# Altium PCB PCB_Rev1.1.PcbDoc (part 4 of 4)
Units mm, origin at the board's own origin, x right, y up, seen from the top; angles counter-clockwise.
Board outline 81.62 x 96.13 mm, 4 copper layers (Top Layer, GND, PWR, Bottom Layer), stack 1.49 mm thick; 185 components, 276 nets, 1052 pads, 353 vias.
Unrouted connection lines stored in the file: 133.
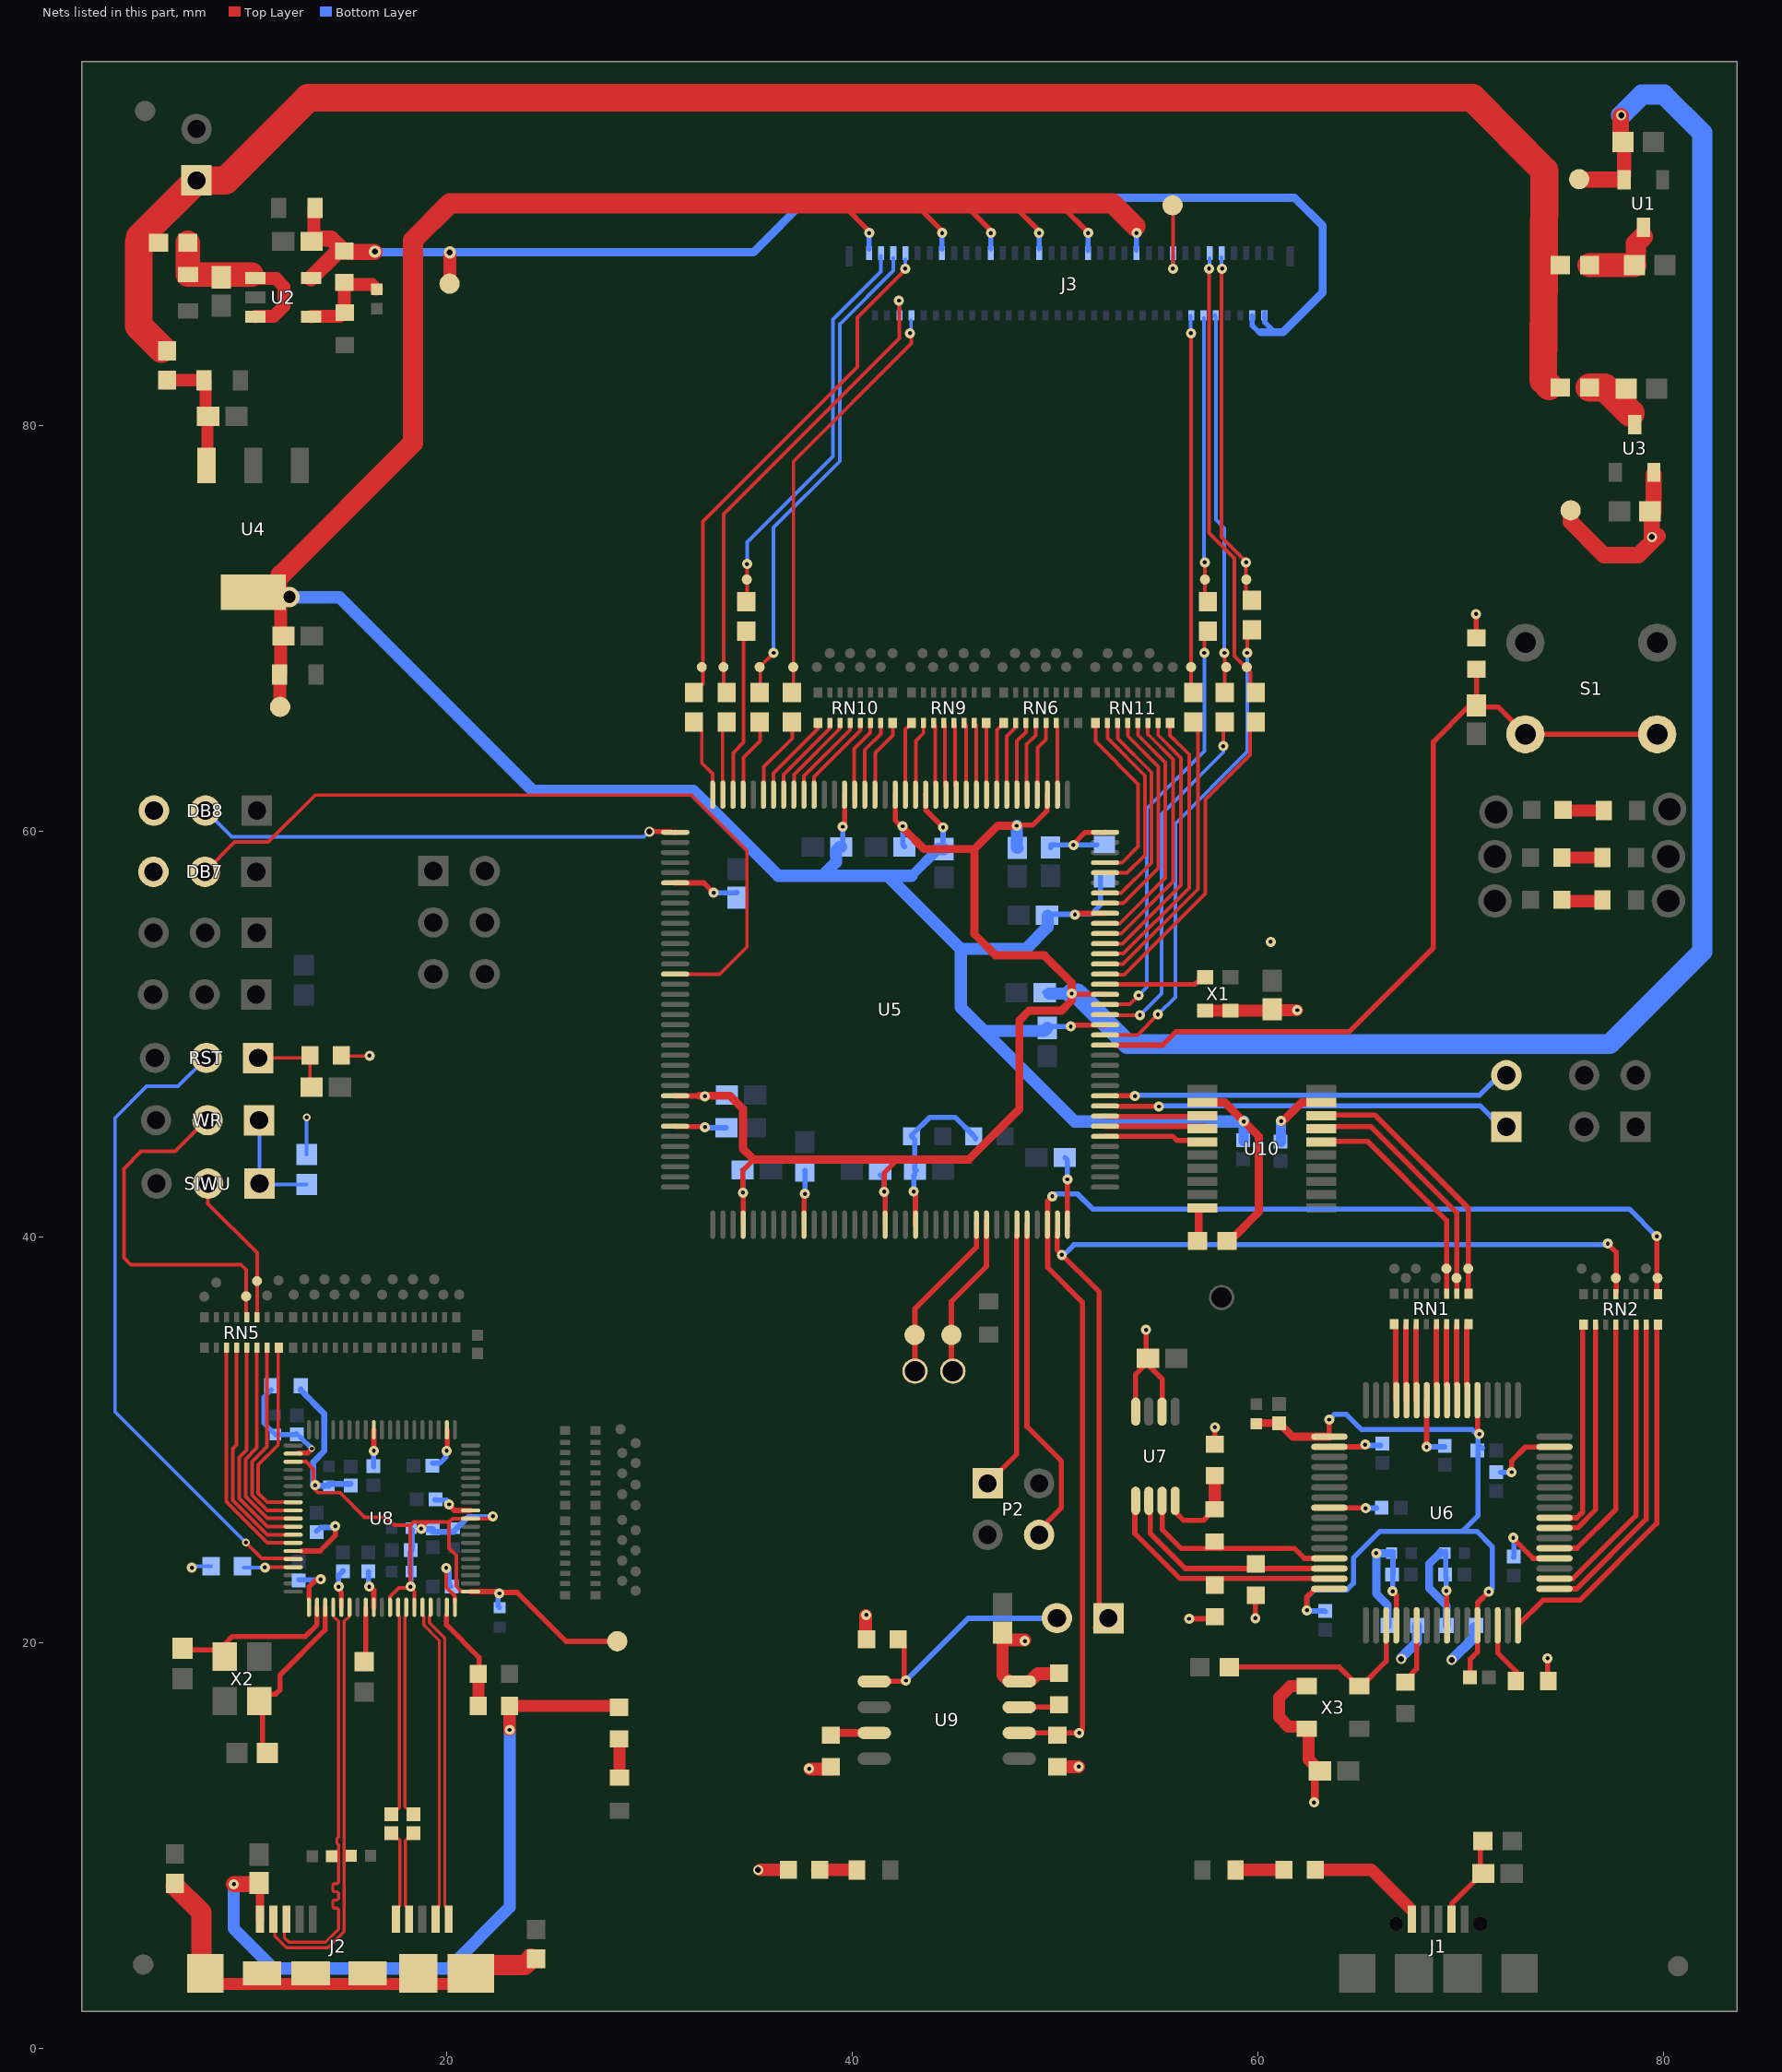
[diagram p5: the nets of this part, all layers, seen from the top]

## Via types
v1: diameter 0.5, hole 0.2, Top Layer to Bottom Layer, tented both sides, 238 vias
v2: diameter 0.5, hole 0.3, Top Layer to Bottom Layer, tented both sides, 106 vias
v3: diameter 0.4, hole 0.2, Top Layer to Bottom Layer, tented both sides, 5 vias
v4: diameter 0.6, hole 0.3, Top Layer to Bottom Layer, tented both sides, 2 vias
v5: diameter 1, hole 0.6, Top Layer to Bottom Layer, tented both sides, 1 vias
v6: diameter 0.3, hole 0.2, Top Layer to Bottom Layer, tented both sides, 1 vias

## Nets (pads, with @x,y where several pads share a name; then routed paths per layer and width w, separated by ;. In a path a pad name is that pad's centre, name@x,y a point inside that pad or via, vN(x,y) a via of type N, cw(c..) or ccw(c..) an arc to the next point about the centre after c; other vN are vias at no path point) (continued)
ICE_Debug3: C74.2 R25.1 S1.3 S1.4 U5.87 | length 42.8
  Top Layer w0.254: U5.87@52.915,49.449 55.287,49.449 55.949,50.111 64.5,50.111 68.645,54.256 68.645,64.409 70.364,66.128 C74.2@70.756,66.128 ; C74.2@70.661,66.033 C74.2@70.756,66.128 ; C74.2@70.77,66.206 R25.1@70.77,68.143 ; 71.337,66.128 C74.2@70.756,66.128 ; S1.4@79.682,64.781 S1.3@73.185,64.781 73.18,64.781 71.83,66.131 70.759,66.131 C74.2@70.756,66.128
ICE_Debug5: P5.1 U5.81 | length 19.5
  Top Layer w0.254: U5.81@53.026,46.444 v1@55.11,46.444
  Bottom Layer w0.254: v1@55.23,46.466 70.941,46.466 71.982,45.425 P5.1@72.245,45.425
  other v1: 55.11,46.424
ICE_Debug6: P5.2 U5.82 | length 19.8
  Top Layer w0.254: U5.82@52.932,46.955 v1@53.95,46.955
  Bottom Layer w0.254: v1@53.898,46.984 53.929,46.984 70.923,46.984 72.008,48.069 P5.2@72.245,48.069
  other v1: 53.929,46.937
ICE_Debug7: DB7.2 U5.15 | length 38.3
  Top Layer w0.18: DB7.2@8.059,57.998 9.529,59.468 11.182,59.468 13.495,61.781 32.062,61.781 34.792,59.051 34.792,54.292 33.451,52.951 U5.15@31.253,52.951
ICE_Debug8: DB8.2 U5.1 | length 23.6
  Top Layer w0.254: v2(29.973,59.979) 31.01,59.979 U5.1@31.03,59.959 ; U5.1@31.251,59.949 U5.1@31.253,59.951 U5.1@31.251,59.953
  Bottom Layer w0.18: DB8.2@8.085,61.019 9.389,59.715 29.709,59.715 v2(29.973,59.979)
ICE_MISO: P2.1 U5.67 | length 12.7
  Top Layer w0.254: P2.1@46.809,27.991 48.097,29.279 U5.67@48.097,40.116
ICE_MOSI: P2.4 U5.68 | length 16.6
  Top Layer w0.254: U5.68@48.603,40.601 48.603,30.64 50.304,28.939 50.304,26.648 P2.4@48.962,25.306 ; P2.4@49.193,25.302 P2.4@49.201,25.302
ICE_SCK: pad.2@79.697,37.97 R18.1 RN2.9 U5.70 U9.6 | length 63.7
  Top Layer w0.254: U9.6@48.222,15.539 v1(51.175,15.539) 51.344,15.708 51.344,36.772 49.627,38.489 49.627,41.772 v1(49.851,41.997) ; RN2.9@79.665,37.297 v1(79.665,40.026)
  Bottom Layer w0.254: v1(49.851,41.997) 49.973,42.119 51.094,42.119 51.843,41.371 78.309,41.371 v1@79.659,40.021
ICE_SS_B: P3.1 pad.2@77.644,37.97 RN2.13 U5.71 | length 50.1
  Top Layer w0.254: U5.71@50.101,40.209 50.101,39.341 52.163,37.279 52.163,20.937 P3.1@51.958,20.732 ; v1@77.277,39.635 77.664,39.248 RN2.13@77.664,37.302
  Bottom Layer w0.254: v1@50.353,39.044 50.919,39.61 v1@77.277,39.61
  other v1: 50.319,39.115 77.245,39.663
ICE_SYSCLK: U5.93 X1.3 | length 4.2
  Top Layer w0.22: U5.93@52.993,52.45 56.879,52.45 X1.3@57.113,52.684
INVERT: J3.12 pad.2@57.383,72.411 R40.2 | length 13.7
  Top Layer w0.18: R40.2@57.371,71.575 v1(57.371,73.256)
  Bottom Layer w0.18: J3.12@57.329,85.303 57.329,73.298 v1(57.371,73.256)
LCD_AVCC_5V25: C2.2 C3.2 J3.2 J3.4 R1.2 TP2.1 U2.5 | length 65.8
  Top Layer w0.635: C3.2@13.323,89.085 C3.2@13.429,89.19 ; C3.2@13.465,89.227 C3.2@13.429,89.19 ; C2.2@13.486,90.736 13.429,90.679 C3.2@13.429,89.19 ; R1.2@14.524,88.501 14.829,88.501 R1.2@14.936,88.608 R1.2@14.911,88.608 ; TP2.1@20.125,86.998 20.138,87.011 v4@20.138,88.477
  Top Layer w0.8: U2.5@13.293,87.27 R1.2@14.524,88.501 ; C3.2@13.465,89.227 14.292,89.227 R1.2@14.911,88.608 ; R1.2@15.163,88.562 v4@16.428,88.562
  Bottom Layer w0.254: J3.4@59.717,85.414 59.717,84.926 60.01,84.633 60.088,84.633 ; J3.2@60.33,85.541 60.33,85.094 60.68,84.744
  Bottom Layer w0.4: v4@16.604,88.545 35.108,88.545 37.796,91.233 61.8,91.233 63.183,89.85 63.183,86.559 61.231,84.607 60.114,84.607
  other v4: 20.138,88.542 16.443,88.575
LCD_VDD_2V5: C12.2 C13.2 C27.1 C29.1 C33.1 C35.1 C76.2 D3.1 J3.23 J3.31 J3.39 J3.47 J3.55 J3.67 R24.2 TP4.1 U4.4 U5.89 U5.100 U5.123 U5.131 U10.2 | length 175.9
  Top Layer w0.254: 39.498,90.907 v1@40.825,89.58 ; v1@39.519,60.273 39.519,60.289 39.603,60.373 U5.131@39.603,61.801 ; 43.093,90.915 v1@44.42,89.588 ; U5.123@43.603,61.801 43.612,61.792 43.612,61.045 v1(44.467,60.19) ; 45.499,90.936 v1@46.826,89.609 ; 47.876,90.922 v1@49.203,89.595 ; 50.289,90.85 v1@51.616,89.523 ; v1@50.775,50.413 50.804,50.442 52.444,50.442 U5.89@52.453,50.451 ; v1@50.94,55.777 51.114,55.951 U5.100@52.453,55.951
  Top Layer w0.4: U10.2@57.77,46.634 58.344,46.634 v1(59.29,45.688) ; R24.2@58.859,40.057 60.039,41.237 60.039,44.959 v1@59.393,45.605
  Top Layer w0.635: U4.4@10.441,71.783 U4.4@11.803,71.783 ; TP4.1@11.768,66.131 11.757,66.142 11.757,67.709 C13.2@11.746,67.72 11.803,67.778 U4.4@11.803,71.783 ; U4.4@11.803,72.63 U4.4@11.803,71.783
  Top Layer w1: U4.4@11.803,72.63 18.311,79.138 18.311,89.133 20.14,90.962 52.813,90.962 53.953,89.822
  Bottom Layer w0.254: C29.1@39.441,59.222 39.546,59.327 39.497,59.376 39.518,59.397 v1(39.518,60.222) ; J3.67@40.822,88.697 v1@40.822,89.502 ; J3.55@44.417,88.705 v1@44.417,89.502 ; v1(44.467,60.19) 44.467,59.165 C27.1@44.506,59.126 ; J3.47@46.823,88.727 v1@46.823,89.502 ; J3.39@49.2,88.712 v1@49.2,89.502 ; C33.1@49.591,55.863 49.622,55.832 49.683,55.893 v1(50.967,55.893) ; C35.1@49.606,50.303 49.724,50.421 49.766,50.378 v1(50.762,50.378) ; C33.1@49.692,55.91 51.768,55.91 52.226,56.368 D3.1@52.226,57.872 ; J3.31@51.613,88.64 v1@51.613,89.502 ; J3.23@54.005,88.647 v1@54.005,89.502
  Bottom Layer w0.5: 42.907,57.802 C27.1@44.231,59.126 ; C76.2@59.297,44.711 v1@59.297,45.688
  Bottom Layer w0.6: v5@12.598,71.535 14.692,71.535 24.225,62.002 32.132,62.002 36.332,57.802 38.514,57.802 ; C29.1@39.441,59.222 39.366,59.222 39.191,59.047 39.191,58.479 38.514,57.802 ; 42.907,57.802 41.733,57.802 ; C27.1@44.231,59.126 C27.1@44.506,59.126 ; 46.556,50.159 49.462,50.159 C35.1@49.606,50.303 ; C33.1@49.622,55.832 49.622,55.271 48.55,54.199 45.336,54.199 ; v1(59.29,45.688) 50.955,45.688 45.336,51.307 45.336,54.199 ; 38.514,57.802 41.733,57.802 ; 41.733,57.802 45.336,54.199
  other v1: 40.825,89.502 44.42,89.502 46.826,89.502 49.203,89.502 51.616,89.502 54.008,89.502
  other v5: 12.229,71.555
NetC4_1: C4.1 R32.2 U1.3 | length 4.4
  Top Layer w0.2: U1.3@78.971,89.316 U1.3@78.971,89.936
  Top Layer w1: C4.1@78.626,87.92 78.626,88.971 U1.3@78.971,89.316
  Top Layer w1.2: R32.2@76.347,87.912 C4.1@78.563,87.912
NetC5_2: C5.2 C6.2 R35.1 U2.1 U2.3 | length 9.2
  Top Layer w0.635: U2.1@10.363,87.449 U2.1@10.543,87.27 10.561,87.253 11.562,87.253 11.96,86.855 11.96,85.893 11.454,85.387 10.561,85.387 U2.3@10.543,85.37
  Top Layer w1.2: C6.2@7.216,87.451 R35.1@7.216,89.02 ; C6.2@7.218,87.449 U2.1@10.363,87.449
NetC7_2: C7.2 R1.1 R2.2 U2.4 | length 5
  Top Layer w0.635: U2.4@13.293,85.37 13.311,85.387 14.717,85.387 14.902,85.573 R2.2@14.952,85.573 14.944,85.581 R1.1@14.944,87.05 ; R1.1@14.936,87.058 R1.1@14.944,87.05 ; C7.2@16.536,86.722 16.308,86.951 15.044,86.951 R1.1@14.944,87.05
NetC8_2: C8.2 C10.2 R34.2 U4.3 | length 6.1
  Top Layer w0.6: R34.2@6.193,82.24 6.195,82.238 8.015,82.238 C8.2@8.017,82.236 8.092,82.161 8.092,80.583 C10.2@8.217,80.458 8.179,80.42 8.179,78.071 U4.3@8.141,78.033
NetC9_1: C9.1 R33.2 U3.3 | length 2.5
  Top Layer w1.37: R33.2@76.348,81.88 77.099,81.88 78.37,80.609
NetC18_2: C18.2 U8.21 X2.3 | length 8.8
  Top Layer w0.254: C18.2@6.962,19.694 7.028,19.63 8.647,19.63 9.045,19.232 9.063,19.249 9.063,19.948 9.413,20.299 13.012,20.299 13.588,20.877 U8.21@13.588,21.736
NetC20_2: C20.2 U8.22 X2.1 | length 8.7
  Top Layer w0.254: C20.2@11.126,14.614 10.895,14.845 10.895,16.931 10.895,17.057 11.294,17.455 11.555,17.455 11.762,17.662 11.762,18.389 13.988,20.616 U8.22@13.988,21.736
NetC25_1: C25.1 J1.4 R16.1 | length 4.7
  Top Layer w0.254: J1.4@69.485,6.369 J1.4@69.501,6.385 ; J1.4@69.495,6.312 69.552,6.369 69.552,7.123 C25.1@70.92,8.491 ; J1.4@69.504,6.216 J1.4@69.504,6.385 ; C25.1@70.969,8.606 70.969,8.982 R16.1@70.969,9.775 ; C25.1@70.977,8.434 70.977,8.606 C25.1@70.977,8.982
NetC30_1: C30.1 D3.2 U5.108 | length 4.3
  Top Layer w0.254: v1@50.872,59.34 51.474,59.942 52.444,59.942 U5.108@52.453,59.951
  Bottom Layer w0.254: C30.1@49.765,59.199 C30.1@49.884,59.318 ; C30.1@49.765,59.318 C30.1@49.884,59.318 ; C30.1@49.908,59.342 C30.1@49.884,59.318 ; D3.2@52.042,59.318 C30.1@49.884,59.318
  other v1: 50.891,59.326
NetC43_1: C43.1 C44.1 L3.2 U8.2 | length 5.3
  Top Layer w0.245: U8.2@12.689,29.333 13.107,29.333 v6(13.333,29.559)
  Bottom Layer w0.245: L3.2@11.339,32.467 10.964,32.092 10.964,30.818 11.529,30.253 C43.1@11.539,30.253 12.54,30.253 12.588,30.301 C44.1@12.588,30.271 ; C44.1@12.76,30.132 v6(13.333,29.559)
NetC59_2: C59.2 R20.2 RST.1 | length 4.4
  Top Layer w0.18: RST.1@10.677,48.823 R20.2@13.117,48.823 ; R20.2@13.24,48.946 13.24,47.46 C59.2@13.321,47.379
  Top Layer w0.5: RST.1@10.677,48.823 RST.1@10.8,48.946 ; R20.2@13.117,48.823 R20.2@13.24,48.946
NetC60_2: C60.2 C68.2 L2.2 U6.4 | length 8.3
  Top Layer w0.254: v1(66.634,22.525) 66.816,22.343 U6.4@66.816,20.846
  Bottom Layer w0.254: C60.2@66.577,24.402 C60.2@66.588,24.413 ; v1(66.634,22.525) 66.637,22.528 66.637,23.347 C68.2@66.64,23.35 ; C68.2@66.652,23.341 C60.2@66.652,24.48
  Bottom Layer w0.4: L2.2@66.395,20.832 66.395,21.84 65.828,22.407 v1(65.828,24.402) C60.2@66.577,24.402
NetC61_2: C61.2 C67.2 L1.2 U6.9 | length 7.8
  Top Layer w0.254: v1(69.283,22.545) 69.307,22.521 69.307,20.855 U6.9@69.316,20.846
  Bottom Layer w0.254: C61.2@69.213,24.408 C61.2@69.213,24.418 ; C61.2@69.226,24.37 C61.2@69.246,24.349 ; C67.2@69.246,23.37 C61.2@69.246,24.349 ; C61.2@69.246,24.493 C61.2@69.246,24.349 ; C67.2@69.252,23.205 69.275,23.182 69.277,23.183 69.283,23.177 v1(69.283,22.545) v1@69.292,22.537 ; C61.2@69.252,24.344 C61.2@69.246,24.349 ; L1.2@69.292,20.845 L1.2@69.3,20.837
  Bottom Layer w0.4: C61.2@69.001,24.438 68.435,23.872 68.435,22.675 69.3,21.81 L1.2@69.3,20.837
NetJ2_Shell: J2.Shell R30.1 R31.1 | length 21
  Top Layer w0.6: J2.Shell@8.079,3.17 13.281,3.17 16.081,3.17 J2.Shell@20.882,3.17
  Top Layer w1: R30.1@6.605,7.977 7.892,6.69 J2.Shell@7.892,3.873 ; J2.Shell@21.181,3.685 21.586,4.089 23.831,4.089 R31.1@24.147,4.405
  Top Layer w1.37: J2.Shell@7.892,3.873 J2.Shell@8.081,3.685
NetJ3_17: J3.17 TP6.1 | length 3.1
  Top Layer w0.18: v1@55.799,87.905 TP6.1@55.799,90.465
  Bottom Layer w0.18: v1@55.8,87.801 J3.17@55.8,88.369
  other v1: 55.799,87.737
NetLED1_1: LED1.1 R3.2 | length 2
  Top Layer w0.6: R3.2@38.247,8.787 LED1.1@40.216,8.787
NetLED2_1: LED2.1 R21.2 | length 2
  Top Layer w0.6: R21.2@75.077,61.023 LED2.1@77.046,61.023
NetLED3_1: LED3.1 R22.2 | length 2
  Top Layer w0.6: R22.2@75.039,58.7 LED3.1@77.008,58.7
NetLED4_1: LED4.1 R23.2 | length 2
  Top Layer w0.6: R23.2@75.049,56.556 LED4.1@77.018,56.556
NetLED6_1: LED6.1 R36.2 | length 2
  Top Layer w0.6: LED6.1@28.507,13.344 R36.2@28.507,15.313
NetLED7_1: LED7.1 R48.2 | length 2.4
  Top Layer w0.6: LED7.1@58.894,8.787 R48.2@61.264,8.787
NetP3_2: P3.2 R14.1 U9.1 | length 12.3
  Top Layer w0.254: U9.1@41.072,18.079 42.633,18.079 v1(42.633,18.121) 42.633,18.188 42.542,18.279 42.542,19.86 R14.1@42.244,20.158
  Bottom Layer w0.254: v1(42.633,18.121) 45.704,21.192 P3.2@49.889,21.192
NetR5_1: R5.1 R6.1 U7.4 | length 3.9
  Top Layer w0.254: U7.4@55.955,26.389 56.314,26.03 57.319,26.03 R6.1@57.858,26.569 R6.1@57.864,26.575
  Top Layer w0.6: R6.1@57.864,26.575 57.864,28.223 R5.1@57.87,28.229
NetR6_2: R6.2 U6.61 U7.3 | length 9.8
  Top Layer w0.254: U7.3@55.279,26.551 55.279,25.564 56.215,24.627 61.802,24.627 62.283,24.146 U6.61@63.516,24.146
NetR7_1: R7.1 U6.62 U7.2 | length 10.7
  Top Layer w0.254: U7.2@54.683,26.494 54.683,25.374 56.412,23.646 U6.62@63.516,23.646
NetR8_1: R8.1 U6.63 U7.1 | length 11.7
  Top Layer w0.254: U7.1@53.921,26.582 53.921,25.374 56.145,23.151 63.512,23.151 U6.63@63.516,23.146
NetR10_2: R10.2 U8.27 | length 2.6
  Top Layer w0.254: R10.2@15.988,19.052 U8.27@15.988,21.673
NetR11_2: R11.2 U6.14 | length 2.7
  Top Layer w0.254: U6.14@71.816,20.846 71.816,19.484 72.747,18.553 R11.2@72.747,18.503
NetR12_2: R12.2 U6.6 | length 2.9
  Top Layer w0.254: R12.2@67.256,18.166 67.281,18.166 67.443,18.329 67.816,18.701 U6.6@67.816,20.846
NetR13_1: R13.1 U6.3 X3.4 | length 10
  Top Layer w0.254: R13.1@58.665,18.784 64.004,18.784 X3.4@64.783,18.005 ; X3.4@64.995,17.848 65.095,17.848 66.316,19.069 U6.3@66.316,20.846
NetR15_1: R15.1 U9.7 | length 2.9
  Top Layer w0.254: U9.7@47.697,16.809 U9.7@47.968,16.809 ; R15.1@50.348,16.809 U9.7@48.222,16.809 ; U9.7@47.968,16.809 U9.7@48.222,16.809 ; U9.7@47.968,16.809 U9.7@48.222,16.809
NetR17_1: R17.1 U9.3 | length 2.1
  Top Layer w0.4: R17.1@38.932,15.539 U9.3@41.072,15.539
NetR24_1: R24.1 U10.10 | length 1.5
  Top Layer w0.4: R24.1@57.07,39.801 U10.10@57.07,41.276
NetR37_1: R37.1 U5.88 | length 23.7
  Top Layer w0.18: U5.88@52.999,49.955 54.049,49.955 v1(55.06,50.966) ; v1@59.46,68.859 59.46,69.924 59.341,70.043 R37.1@59.534,70.236
  Bottom Layer w0.18: v1(55.06,50.966) 55.913,51.819 55.913,60.371 59.474,63.932 59.474,68.818 v1@59.433,68.859
  other v1: 59.46,68.793
NetR38_1: R38.1 U5.90 | length 17.5
  Top Layer w0.18: U5.90@52.975,50.934 v1(54.174,50.934) ; v1@58.295,64.179 R38.1@58.295,65.508
  Bottom Layer w0.18: v1(54.174,50.934) 55.231,51.991 55.231,60.843 58.283,63.895 v1(58.283,64.196)
NetR39_2: R39.2 U8.16 | length 2.4
  Top Layer w0.18: v1(11.017,23.699) 11.028,23.711 U8.16@12.413,23.711
  Bottom Layer w0.18: R39.2@9.972,23.699 v1(11.017,23.699)
NetR40_1: R40.1 U5.91 | length 20.4
  Top Layer w0.18: U5.91@52.9,51.467 53.679,51.467 v1(54.115,51.903) ; v1@57.349,68.632 v1(57.349,68.793) R40.1@57.349,69.439
  Bottom Layer w0.18: v1(54.115,51.903) 54.517,52.305 54.517,61.123 57.349,63.955 v1(57.349,68.793)
NetR41_1: R41.1 U5.94 | length 15.9
  Top Layer w0.18: U5.94@52.557,52.918 53.392,52.918 57.41,56.936 57.41,61.574 59.602,63.766 R41.1@59.602,65.391
NetR42_1: R42.1 U5.95 | length 14.1
  Top Layer w0.18: U5.95@52.528,53.443 53.325,53.443 57.027,57.145 R42.1@57.027,65.218
NetR43_1: R43.1 U5.139 | length 3.9
  Top Layer w0.18: U5.139@35.625,61.933 35.625,63.172 37.03,64.577 37.03,65.077 R43.1@36.876,65.231
NetR44_1: R44.1 U5.141 | length 3.4
  Top Layer w0.18: U5.141@34.612,62.325 34.612,63.634 35.439,64.461 R44.1@35.439,65.414
NetR45_1: R45.1 U5.142 | length 7.5
  Top Layer w0.18: U5.142@34.115,62.426 34.115,63.87 34.622,64.377 34.622,69.426 R45.1@34.822,69.626
NetR46_1: R46.1 U5.143 | length 3.4
  Top Layer w0.18: U5.143@33.588,62.099 U5.143@33.588,62.307 ; R46.1@33.588,65.272 U5.143@33.588,62.307 ; U5.143@33.611,62.247 U5.143@33.611,62.284 ; U5.143@33.611,62.458 U5.143@33.611,62.284 ; U5.143@33.617,62.278 U5.143@33.611,62.284 ; U5.143@33.588,62.307 U5.143@33.611,62.284
NetR47_1: R47.1 U5.144 | length 3.4
  Top Layer w0.18: R47.1@32.297,65.166 32.564,64.899 32.564,63.371 33.101,62.834 U5.144@33.101,62.14
NetRN1_1: RN1.1 U6.45 | length 3.7
  Top Layer w0.254: RN1.1@66.79,35.636 66.79,31.972 U6.45@66.816,31.946
NetRN1_2: RN1.2 U6.44 | length 3.7
  Top Layer w0.254: RN1.2@67.29,35.636 67.29,31.972 U6.44@67.316,31.946
NetRN1_3: RN1.3 U6.43 | length 3.7
  Top Layer w0.254: RN1.3@67.79,35.636 67.79,31.972 U6.43@67.816,31.946
NetRN1_5: RN1.5 U6.41 | length 3
  Top Layer w0.254: U6.41@68.79,32.636 RN1.5@68.79,35.636
NetRN1_6: RN1.6 U6.40 | length 3
  Top Layer w0.254: U6.40@69.29,32.684 RN1.6@69.29,35.636
NetRN1_7: RN1.7 U6.39 | length 2.9
  Top Layer w0.254: U6.39@69.79,32.708 RN1.7@69.79,35.636
NetRN1_8: RN1.8 U6.38 | length 3
  Top Layer w0.254: U6.38@70.29,32.639 RN1.8@70.29,35.636
NetRN2_1: RN2.1 U6.24 | length 10.8
  Top Layer w0.254: U6.24@74.616,26.146 75.723,26.146 76.007,26.43 RN2.1@76.007,35.681
NetRN2_2: RN2.2 U6.23 | length 11.5
  Top Layer w0.254: U6.23@74.616,25.646 74.625,25.655 75.756,25.655 76.637,26.536 RN2.2@76.637,35.681
NetRN2_4: RN2.4 U6.21 | length 12.8
  Top Layer w0.254: U6.21@74.616,24.646 75.726,24.646 77.645,26.565 RN2.4@77.645,35.506
NetRN2_6: RN2.6 U6.18 | length 14.7
  Top Layer w0.254: U6.18@74.616,23.146 75.521,23.146 78.637,26.262 RN2.6@78.637,35.681
NetRN2_7: RN2.7 U6.17 | length 15.5
  Top Layer w0.254: U6.17@74.616,22.646 75.711,22.646 79.137,26.072 RN2.7@79.137,35.681
NetRN2_8: RN2.8 U6.16 | length 18.6
  Top Layer w0.254: U6.16@72.816,20.846 74.061,22.091 75.884,22.091 79.66,25.867 RN2.8@79.66,35.587
NetRN5_3: RN5.3 U8.13 | length 11.7
  Top Layer w0.18: RN5.3@9.122,34.529 9.122,26.936 11.143,24.915 12.41,24.915 U8.13@12.413,24.911
NetRN6_1: RN6.1 U5.116 | length 3.8
  Top Layer w0.18: U5.116@47.12,61.713 47.12,65.003 RN6.1@47.45,65.333
NetRN6_2: RN6.2 U5.115 | length 3.6
  Top Layer w0.18: U5.115@47.6,61.733 47.6,64.671 RN6.2@48.036,65.107
NetRN6_3: RN6.3 U5.114 | length 3.7
  Top Layer w0.18: U5.114@48.111,61.652 48.111,64.447 48.547,64.883 RN6.3@48.547,65.138
NetRN6_4: RN6.4 U5.113 | length 4.1
  Top Layer w0.18: U5.113@48.59,61.397 48.59,64.284 49.037,64.731 RN6.4@49.037,65.333
NetRN6_5: RN6.5 U5.112 | length 4.1
  Top Layer w0.18: U5.112@49.121,61.448 49.121,64.11 49.537,64.526 RN6.5@49.537,65.333
NetRN6_6: RN6.6 U5.110 | length 3.4
  Top Layer w0.18: U5.110@50.101,61.682 RN6.6@50.101,65.128
NetRN9_1: RN9.1 U5.125 | length 3.8
  Top Layer w0.18: U5.125@42.599,61.666 42.599,65.017 RN9.1@42.911,65.329
NetRN9_2: RN9.2 U5.124 | length 3.7
  Top Layer w0.18: U5.124@43.12,61.747 43.12,64.461 43.498,64.839 RN9.2@43.498,65.329
NetRN9_3: RN9.3 U5.122 | length 3
  Top Layer w0.18: U5.122@44.081,62.212 RN9.3@44.081,65.22
NetRN9_4: RN9.4 U5.121 | length 3
  Top Layer w0.18: U5.121@44.546,62.23 RN9.4@44.546,65.238
NetRN9_5: RN9.5 U5.120 | length 3
  Top Layer w0.18: U5.120@45.054,62.243 RN9.5@45.054,65.251
NetRN9_6: RN9.6 U5.119 | length 3.6
  Top Layer w0.18: RN9.6@45.498,65.329 45.603,65.224 U5.119@45.603,61.801
NetRN9_7: RN9.7 U5.118 | length 4
  Top Layer w0.18: RN9.7@45.998,65.329 46.106,65.221 U5.118@46.106,61.367
NetRN9_8: RN9.8 U5.117 | length 3
  Top Layer w0.18: U5.117@46.61,62.379 RN9.8@46.61,65.387
NetRN10_1: RN10.1 U5.138 | length 4.2
  Top Layer w0.18: U5.138@36.098,61.926 36.098,62.859 38.288,65.049 RN10.1@38.288,65.247
NetRN10_2: RN10.2 U5.137 | length 4.5
  Top Layer w0.18: U5.137@36.606,61.625 36.606,62.786 38.901,65.081 RN10.2@38.901,65.182
NetRN10_3: RN10.3 U5.136 | length 4.6
  Top Layer w0.18: U5.136@37.114,61.646 37.114,62.801 39.39,65.077 RN10.3@39.39,65.254
NetRN10_4: RN10.4 U5.135 | length 4.9
  Top Layer w0.18: U5.135@37.594,61.304 37.594,62.718 39.884,65.008 RN10.4@39.884,65.254
NetRN10_5: RN10.5 U5.134 | length 4.9
  Top Layer w0.18: U5.134@38.104,61.304 38.104,62.685 40.389,64.97 RN10.5@40.389,65.247
NetRN10_6: RN10.6 U5.130 | length 4
  Top Layer w0.18: U5.130@40.079,61.546 40.079,64.061 40.883,64.865 RN10.6@40.883,65.238 ; U5.130@40.103,61.801 U5.130@40.12,61.818
NetRN10_7: RN10.7 U5.129 | length 3.7
  Top Layer w0.18: U5.129@40.606,61.814 40.606,64.01 41.395,64.799 RN10.7@41.395,65.152
NetRN10_8: RN10.8 U5.128 | length 3.8
  Top Layer w0.18: U5.128@41.116,61.806 41.116,63.858 41.981,64.723 RN10.8@41.981,65.284
NetRN11_1: RN11.1 U5.105 | length 8.4
  Top Layer w0.18: RN11.1@51.984,65.329 51.984,64.43 54.088,62.325 54.088,59.245 53.296,58.453 U5.105@52.954,58.453
NetRN11_2: RN11.2 U5.104 | length 9.6
  Top Layer w0.18: U5.104@52.453,57.951 53.542,57.951 54.415,58.824 54.415,62.735 52.571,64.579 RN11.2@52.571,65.329
NetRN11_3: RN11.3 U5.102 | length 10.5
  Top Layer w0.18: U5.102@52.453,56.951 53.241,56.951 54.751,58.461 54.751,62.895 53.071,64.575 RN11.3@53.071,65.329
NetRN11_4: RN11.4 U5.101 | length 11.1
  Top Layer w0.18: U5.101@52.453,56.451 53.354,56.451 55.082,58.179 55.082,63.184 53.571,64.695 RN11.4@53.571,65.329
NetRN11_5: RN11.5 U5.99 | length 12.1
  Top Layer w0.18: U5.99@52.453,55.451 53.184,55.451 55.43,57.697 55.43,63.386 54.071,64.745 RN11.5@54.071,65.329
NetRN11_6: RN11.6 U5.98 | length 12.6
  Top Layer w0.18: U5.98@52.453,54.951 53.251,54.951 55.814,57.514 55.814,63.536 54.569,64.781 RN11.6@54.569,65.153
NetRN11_7: RN11.7 U5.97 | length 13.4
  Top Layer w0.18: U5.97@52.453,54.451 53.312,54.451 56.197,57.336 56.197,63.618 55.071,64.744 RN11.7@55.071,65.329
NetRN11_8: RN11.8 U5.96 | length 13.7
  Top Layer w0.18: U5.96@52.76,53.967 53.362,53.967 56.598,57.203 56.598,63.782 55.658,64.722 RN11.8@55.658,65.329
NetTP8_1: pad.1@43.079,33.381 TP8.1 U5.63 | length 8.6
  Top Layer w0.254: pad.1@43.079,33.4 43.079,36.457 46.104,39.482 U5.63@46.104,40.738
NetTP9_1: pad.1@44.944,33.381 TP9.1 U5.64 | length 8.1
  Top Layer w0.254: pad.1@44.876,33.381 TP9.1@44.876,35.165 44.876,36.814 46.601,38.539 U5.64@46.601,40.78
R\E\S\E\T\: J3.65 pad.2@34.784,72.411 R45.2 | length 19.3
  Top Layer w0.18: R45.2@34.796,71.767 v1@34.796,73.171
  Bottom Layer w0.18: v1(34.794,73.171) 34.794,74.258 39.024,78.488 39.024,85.232 41.396,87.604 J3.65@41.396,88.36
R\S\T\: U5.78 U10.5 | length 5.1
  Top Layer w0.254: U5.78@52.453,44.951 55.8,44.951 55.992,44.759 U10.5@57.432,44.759
RD_N: RN5.4 U8.12 | length 11.3
  Top Layer w0.18: RN5.4@9.622,34.529 9.622,29.743 9.442,29.563 9.442,27.014 11.145,25.311 U8.12@12.413,25.311
RESET_N: RST.2 U8.15 | length 32
  Top Layer w0.18: v3(10.081,24.929) 10.869,24.141 12.384,24.141 U8.15@12.413,24.111
  Bottom Layer w0.18: RST.2@8.137,48.823 6.731,47.417 5.185,47.417 3.625,45.857 3.625,31.385 v3(10.081,24.929)
ROD_N: J2.9 U8.34 | length 15.8
  Top Layer w0.15: U8.34@18.788,21.736 18.788,21.348 18.85,21.286 18.85,20.865 19.617,20.098 19.617,7.021 19.431,6.834 J2.9@19.431,6.359
ROD_P: J2.10 U8.35 | length 15.8
  Top Layer w0.15: U8.35@19.188,21.736 19.188,21.348 19.127,21.286 19.127,20.98 19.895,20.212 19.895,7.021 20.081,6.834 J2.10@20.081,6.359
RS232_Rx_TTl: U5.80 U10.3 | length 5
  Top Layer w0.254: U5.80@52.453,45.951 52.458,45.946 57.319,45.946 U10.3@57.432,46.059
RS232_Tx_TTL: U5.79 U10.4 | length 5
  Top Layer w0.254: U5.79@52.453,45.451 52.455,45.449 57.392,45.449 U10.4@57.432,45.409
RSTRN: pad.2@69.291,38.433 RN1.11 U10.16 | length 10.8
  Top Layer w0.254: U10.16@63.669,44.718 65.391,44.718 69.296,40.813 RN1.11@69.296,37.246
Rx_TTL: pad.2@70.363,38.433 RN1.9 U10.18 | length 12.8
  Top Layer w0.254: U10.18@63.693,46 65.779,46 70.368,41.411 RN1.9@70.368,37.236
RXF_N: RN5.7 U8.9 | length 9.9
  Top Layer w0.18: RN5.7@11.122,34.529 11.122,29.653 10.383,28.914 10.383,27.268 11.136,26.515 12.41,26.515 U8.9@12.413,26.511
SCK: J3.61 pad.2@32.564,68.096 R47.2 | length 25.5
  Top Layer w0.18: R47.2@32.462,67.125 32.614,67.277 32.614,75.271 40.24,82.897 40.24,85.319 42.586,87.665 v1@42.586,87.879
  Bottom Layer w0.18: v1@42.602,87.624 J3.61@42.602,88.192
  other v1: 42.59,87.737
SDAT: J3.62 pad.2@33.631,68.096 R46.2 | length 23.5
  Top Layer w0.18: R46.2@33.622,67.044 R46.2@33.796,66.87 ; R46.2@33.642,67.044 33.642,75.637 42.31,84.305 v1@42.31,86.162
  Bottom Layer w0.18: J3.62@42.298,85.49 v1@42.298,86.058
  other v1: 42.292,86.162
SEN: J3.63 pad.2@35.42,68.096 R44.2 | length 24
  Top Layer w0.18: R44.2@35.452,67.022 35.452,68.127 36.105,68.78 v1(36.105,68.793)
  Bottom Layer w0.18: v1@36.105,68.78 v1(36.105,68.793) 36.105,74.97 39.383,78.248 39.383,85.013 42.002,87.632 J3.63@42.002,88.246
SIWU_N: RN5.6 U8.10 | length 10.4
  Top Layer w0.18: RN5.6@10.622,34.529 10.622,29.597 10.06,29.035 10.06,27.193 11.138,26.115 12.41,26.115 U8.10@12.413,26.111
SIWU_N_2: pad.2@10.628,37.821 RN5.11 SIWU.2 | length 7.6
  Top Layer w0.18: SIWU.2@8.215,42.625 8.215,41.632 10.628,39.219 pad.2@10.628,37.821 10.628,36.035 RN5.11@10.622,36.029
SLM_CLK: J3.14 pad.2@56.697,68.096 R42.2 | length 18.4
  Top Layer w0.18: R42.2@56.687,67.041 v1@56.687,84.508
  Bottom Layer w0.18: v1@56.681,84.497 J3.14@56.681,85.407
  other v1: 56.691,84.555
SOUT: J3.60 pad.2@37.074,68.096 R43.2 | length 20.7
  Top Layer w0.18: R43.2@37.088,66.828 37.088,78.239 42.899,84.05 v1@42.899,84.555
  Bottom Layer w0.18: v1@42.885,84.621 J3.60@42.885,85.189
  other v1: 42.839,84.555
SYNC: J3.10 pad.2@58.43,68.092 R38.2 | length 18.8
  Top Layer w0.18: R38.2@58.364,66.716 v1@58.364,68.793
  Bottom Layer w0.18: J3.10@57.877,85.4 J3.10@57.877,85.452 ; J3.10@57.918,85.326 57.918,75.356 58.337,74.937 v1(58.337,68.793)
TD1_N: C23.1 J2.6 | length 4.5
  Top Layer w0.15: C23.1@17.293,10.627 17.293,10.597 17.558,10.332 17.584,10.332 17.667,10.249 17.667,7.021 17.481,6.834 J2.6@17.481,6.359
TD1_P: C24.1 J2.7 | length 4.5
  Top Layer w0.15: 17.945,8.716 17.945,7.021 18.131,6.834 J2.7@18.131,6.359 ; 17.945,8.725 17.945,10.24 18.037,10.332 18.063,10.332 18.328,10.597 C24.1@18.328,10.627
TD_N: C23.2 U8.31 | length 10.4
  Top Layer w0.15: C23.2@17.293,11.487 17.293,11.517 17.558,11.782 17.584,11.782 17.65,11.848 17.65,21.286 17.588,21.348 U8.31@17.588,21.736
TD_P: C24.2 U8.32 | length 10.5
  Top Layer w0.15: U8.32@17.988,21.736 17.988,21.348 17.927,21.286 17.927,11.892 18.037,11.782 18.063,11.782 18.328,11.517 C24.2@18.328,11.487
Tx_TTL: pad.2@69.784,37.97 RN1.10 U10.17 | length 11.8
  Top Layer w0.254: U10.17@63.657,45.427 65.571,45.427 69.795,41.203 RN1.10@69.795,37.268
TXE_N: RN5.8 U8.8 | length 9.6
  Top Layer w0.18: RN5.8@11.607,34.426 RN5.8@11.672,34.492 ; RN5.8@11.709,34.529 RN5.8@11.672,34.492 ; U8.8@12.413,26.911 11.138,26.911 10.692,27.357 10.692,28.759 11.672,29.74 RN5.8@11.672,34.492
UPDATE: J3.9 pad.2@59.419,72.411 R37.2 | length 17.6
  Top Layer w0.18: v1@58.202,87.737 58.202,74.504 59.4,73.306 59.4,72.411 R37.2@59.4,71.155
  Bottom Layer w0.18: v1@58.202,87.737 J3.9@58.202,88.305
  other v1: 59.408,73.256 58.226,87.737
USB_D_N: D1.2 J2.2 U8.25 | length 21.3
  Top Layer w0.15: J2.2@11.42,6.389 11.498,6.311 11.498,5.531 12.084,4.946 14.117,4.946 14.924,5.753 14.924,5.771 14.927,5.774 14.927,9.478 ; U8.25@15.188,21.736 15.188,21.301 14.927,21.04 14.927,9.478 ; D1.2@15.272,9.478 14.927,9.478
USB_D_P: D2.2 J2.3 U8.23 | length 21.3
  Top Layer w0.15: J2.3@12.149,6.359 11.975,6.186 11.975,5.446 12.198,5.223 14.003,5.223 14.647,5.867 ; D2.2@14.311,9.461 14.32,9.47 14.65,9.47 ; U8.23@14.388,21.736 14.388,21.301 14.65,21.04 14.65,10.57 14.65,10.401 14.62,10.371 14.605,10.371 14.575,10.341 14.575,10.101 14.605,10.071 14.62,10.071 14.65,10.041 14.65,9.771 14.65,9.47 ; 14.65,5.867 14.65,6.492 14.65,6.839 14.589,6.9 14.428,6.9 14.367,6.961 14.367,7.244 14.428,7.304 14.589,7.304 14.65,7.365 14.65,7.648 14.589,7.708 14.428,7.708 14.367,7.769 14.367,8.052 14.428,8.113 14.589,8.113 14.65,8.173 14.65,8.517 14.65,8.719 14.65,8.869 14.65,9.17 14.65,9.47
VALID: J3.11 pad.2@59.445,68.096 R41.2 | length 22.2
  Top Layer w0.18: v1(57.582,87.737) 57.582,74.709 58.837,73.454 58.837,68.635 59.629,67.843 R41.2@59.629,66.733
  Bottom Layer w0.18: v1@57.598,87.887 J3.11@57.598,88.255
VBUS_IN: R9.2 R19.1 U8.37 | length 5.1
  Top Layer w0.254: U8.37@19.979,21.35 19.979,20.865 21.576,19.268 R9.2@21.576,18.474
  Top Layer w0.6: R19.1@21.536,16.877 21.556,16.897 R9.2@21.556,18.453
VCC1_8FT: C16.2 C17.2 C19.2 C49.2 C72.2 U6.12 U6.37 U6.49 U6.64 | length 40.8
  Top Layer w0.254: C17.2@59.908,30.787 C17.2@59.94,30.819 ; v1@62.386,21.561 62.386,21.584 62.384,22.224 U6.64@62.761,22.604 ; U6.64@63.229,22.625 63.25,22.646 U6.64@63.516,22.646 ; v1(63.51,30.987) 63.51,30.152 U6.49@63.516,30.146 ; C19.2@70.462,18.287 70.462,19.172 70.816,19.526 U6.12@70.816,20.846 70.825,20.855 70.825,21.954 v1(71.376,22.505) ; v1@70.816,30.405 U6.37@70.816,31.946
  Top Layer w0.4: C17.2@59.94,30.819 61.039,30.819 61.712,30.146 U6.49@63.516,30.146
  Bottom Layer w0.254: C72.2@63.315,21.522 63.284,21.553 62.437,21.553 v1(62.406,21.584) 62.406,22.21 62.79,22.594 64.38,22.594 64.7,22.914 64.7,24.176 66.01,25.486 70.082,25.486 ; v1(63.51,30.987) 63.767,31.244 64.348,31.244 65.1,30.492 70.558,30.492 v1@70.84,30.21 ; v1(70.908,30.278) v1@70.84,30.21 ; C49.2@71.035,29.613 C49.2@71.067,29.581 ; v1@71.394,22.505 71.544,22.654 71.544,24.724 70.782,25.486 70.082,25.486 ; 70.082,25.486 70.84,26.244 v1@70.84,30.21
VCC_1V2: C1.1 C28.1 C31.1 C34.1 C36.1 C41.1 C42.1 TP1.1 U1.2 U5.27 U5.40 U5.54 U5.92 U5.111 U5.126 | length 149.1
  Top Layer w0.254: U5.27@31.253,46.951 31.255,46.949 32.442,46.949 ; U5.40@34.603,40.601 34.601,40.603 34.601,42.172 v1(34.591,42.182) 34.591,43.278 35.125,43.812 ; U5.54@41.603,40.601 41.603,41.988 41.562,42.029 v1(41.562,42.227) 41.562,43.155 42.219,43.812 ; U5.126@42.103,61.801 42.103,60.537 42.432,60.209 v1@42.553,60.087 ; v1@48.1,60.299 48.88,60.299 49.594,61.013 49.594,61.792 U5.111@49.603,61.801 ; v1@50.76,51.88 50.807,51.927 50.84,51.96 52.444,51.96 U5.92@52.453,51.951 ; v2@77.883,95.273 v2(77.914,95.304)
  Top Layer w0.4: 32.442,46.958 33.95,46.958 34.595,46.313 34.595,44.342 35.125,43.812 42.219,43.812 45.734,43.812 48.229,46.307 48.229,50.673 48.716,51.16 50.311,51.16 50.807,51.656 50.807,51.927 v1(50.807,51.993) 50.807,52.533 49.463,53.877 47.062,53.877 46.01,54.929 46.01,59.119 ; v1@42.553,60.087 43.521,59.119 46.01,59.119 ; v1(48.1,60.271) 47.162,60.271 46.01,59.119
  Top Layer w0.7: U1.2@78.046,92.323 C1.1@78.046,93.597
  Top Layer w0.8: TP1.1@75.85,92.149 75.861,92.138 U1.2@77.861,92.138 ; C1.1@77.883,93.98 v2@77.883,95.273
  Bottom Layer w0.254: v1(32.715,46.932) 33.746,46.932 C36.1@33.805,46.991 ; C42.1@34.574,43.3 34.591,43.283 v1(34.591,42.182) ; C41.1@41.373,43.058 41.367,43.052 41.562,42.857 v1(41.562,42.227) ; v1(42.47,60.247) 42.47,59.367 42.549,59.288 42.525,59.264 C28.1@42.56,59.229 ; C34.1@49.477,52.047 49.605,52.047 49.679,51.973 C34.1@49.702,51.996
  Bottom Layer w0.6: v1(48.1,60.271) 48.1,59.216 C31.1@48.133,59.183 ; C34.1@49.702,51.996 49.705,51.993 v1(50.807,51.993)
  Bottom Layer w1: v1(50.807,51.993) 51.078,51.993 53.566,49.505 77.337,49.505 81.906,54.074 81.906,94.427 80.014,96.319 78.929,96.319 v2(77.914,95.304)
VCC_3V3: C11.1 C14.2 C15.2 C21.2 C22.2 C32.1 C37.1 C38.1 C39.1 C40.1 C45.2 C46.2 C50.1 C51.1 C52.2 C53.2 C54.1 C55.1 C63.2 C64.1 C65.1 C66.1 C70.1 C75.2 DB7.3 DB8.3 L1.1 L2.1 R3.1 R5.2 R7.2 R8.2 R11.1 R14.2 R15.2 R17.2 R18.2 R20.1 R25.2 R26.1 R27.1 R39.1 R52.1 TP3.1 U3.2 U5.6 U5.30 U5.46 U5.57 U5.72 U6.20 U6.31 U6.42 U6.50 U6.56 U7.6 U7.8 U8.14 U8.20 U8.24 U8.28 U8.38 U8.49 U8.59 U8.68 U9.8 U10.19 X1.1 X1.4 X3.1 X3.6 | length 106.4
  Top Layer w0.18: R20.1@14.821,48.915 v1@16.143,48.915
  Top Layer w0.2: v1@19.958,23.584 19.958,22.719 20.387,22.29 U8.38@20.387,21.983
  Top Layer w0.254: U8.14@12.821,24.511 13.732,24.511 14.484,25.263 v1@14.484,25.731 ; U8.20@13.187,22.169 13.187,22.738 v1@13.539,23.09 ; v1@14.611,22.652 14.794,22.469 U8.24@14.794,21.768 ; v1@16.163,22.809 16.388,22.584 U8.28@16.388,21.736 ; v1@16.388,29.6 U8.68@16.388,30.486 ; U8.59@20.006,30.468 20.006,29.491 v1@20.024,29.473 ; v1@20.032,26.836 20.357,26.511 U8.49@21.163,26.511 ; U5.30@31.253,45.451 31.262,45.442 32.661,45.442 32.697,45.406 v1(32.715,45.406) ; U5.6@31.253,57.451 32.666,57.451 v1(33.151,56.967) ; U5.46@37.603,40.601 v1@37.603,42.214 ; v1(43.021,42.24) 43.021,42.173 43.103,42.091 U5.57@43.103,40.601 ; v1(50.594,42.831) 50.594,40.61 U5.72@50.603,40.601 ; U7.8@53.962,31.904 53.962,33.216 54.504,33.758 55.273,32.989 U7.6@55.273,31.942 ; v1(54.479,35.412) 54.479,34.105 C15.2@54.57,34.015 ; v1(56.599,21.17) R8.2@57.766,21.17 ; R5.2@57.87,29.779 v1(57.87,30.614) ; R8.2@58.085,21.219 R8.2@58.19,21.323 ; v1(59.867,21.195) 59.867,22.307 R7.2@59.886,22.326 ; U6.56@63.516,26.646 63.525,26.637 65.289,26.637 v1(65.307,26.62) ; U6.50@63.516,29.646 v1@65.28,29.646 ; v1(68.313,29.638) v1(68.313,29.638) 68.314,31.944 U6.42@68.316,31.946 ; v1(70.75,70.712) 70.75,69.542 R25.2@70.761,69.531 ; v1(72.503,28.396) 72.503,28.952 73.188,29.637 74.607,29.637 U6.31@74.616,29.646 ; v1@72.659,25.048 73.562,24.146 U6.20@74.616,24.146 ; v1(74.278,19.223) 74.278,18.127 R11.1@74.312,18.093 R11.1@74.322,18.083
  Top Layer w0.4: v1@61.163,45.643 62.146,46.626 U10.19@62.517,46.626 ; v1@62.801,12.144 C22.2@62.801,13.414
  Top Layer w0.6: v2@35.453,8.787 R3.1@36.837,8.787 ; C21.2@47.397,20.481 47.397,18.379 47.697,18.079 U9.8@48.222,18.079 ; X1.4@57.393,51.154 C14.2@60.621,51.154 ; C14.2@60.745,51.179 v1(61.927,51.179) ; X3.1@62.395,15.748 62.295,15.848 61.505,15.848 61.039,16.314 61.039,17.289 61.598,17.848 X3.6@62.395,17.848 ; X3.1@62.494,15.748 62.494,14.224 C22.2@63.048,13.67
  Top Layer w0.635: v1@37.885,13.748 R17.2@38.932,13.748 ; R14.2@40.649,20.283 v1@40.649,21.33 ; C21.2@47.784,20.125 v1@48.488,20.125 ; U9.8@48.827,18.163 49.137,18.473 R15.2@50.108,18.473 ; R18.2@50.108,13.875 v1(51.155,13.875)
  Top Layer w0.8: TP3.1@75.415,75.823 75.415,75.257 77.059,73.613 78.755,73.613 79.704,74.562 ; v2(79.421,74.504) C11.1@79.421,75.797 ; C11.1@79.515,75.753 U3.2@79.515,77.599
  Bottom Layer w0.18: v1@7.487,23.758 R39.1@8.363,23.758 ; R52.1@13.08,44.056 v3(13.08,45.895)
  Bottom Layer w0.254: C66.1@12.695,23.09 v1@13.539,23.09 ; C55.1@13.562,25.488 13.744,25.669 14.417,25.669 v1@14.469,25.617 ; v1@14.649,22.668 14.649,23.299 14.868,23.519 C65.1@14.868,23.547 ; C64.1@16.126,23.495 16.126,22.815 v1@16.245,22.696 ; C51.1@16.369,28.65 16.379,28.659 16.379,29.591 v1@16.388,29.6 ; C50.1@19.299,28.833 19.64,28.833 19.936,29.129 19.936,29.348 v1@19.984,29.396 ; C54.1@19.401,27.046 19.422,27.025 19.969,27.025 v1@20.2,26.794 ; v1(19.958,23.675) 20.108,23.525 20.108,22.844 C70.1@20.19,22.762 ; v1(32.715,45.406) 32.741,45.38 C37.1@33.775,45.38 ; v1(33.151,56.967) 34.282,56.967 C32.1@34.304,56.989 ; v1(37.649,42.12) 37.649,43.228 37.626,43.251 C38.1@37.649,43.274 ; v1(43.021,42.24) 43.021,43.034 C40.1@43.054,43.067 ; C40.1@43.147,43.283 C40.1@43.072,43.283 43.072,44.791 R26.1@42.904,44.959 42.904,44.984 43.817,45.897 45.063,45.897 45.978,44.982 R27.1@45.978,44.957 ; R27.1@46.063,44.835 R27.1@46.063,44.86 ; C39.1@50.47,43.911 50.594,43.787 v1(50.594,42.831) ; v1(65.28,29.75) 65.313,29.717 C45.2@66.052,29.717 ; v1(65.307,26.62) 65.31,26.623 65.837,26.623 C53.2@65.84,26.626 ; v1(68.313,29.638) 68.322,29.648 C46.2@69.21,29.648 ; L1.1@70.667,20.754 L1.1@70.75,20.837 ; C52.2@71.957,28.389 71.96,28.393 72.499,28.393 v1(72.503,28.396) ; C63.2@72.6,24.194 72.618,24.212 v1@72.618,25.165
  Bottom Layer w0.5: C75.2@61.134,44.684 v1(61.134,45.714) ; v2@67.051,19.228 67.845,20.022 L2.1@67.845,20.832 ; v2(69.543,19.14) 70.667,20.264 L1.1@70.667,20.754
  other v1: 62.761,12.117 37.86,13.774 48.492,20.068 40.675,21.355 14.658,22.754 16.163,22.754 13.767,23.117 7.417,23.688 72.586,25.165 14.489,25.731 20.1,26.806 16.388,29.45 19.984,29.45 16.18,48.93 60.619,54.549
  other v2: 35.34,8.787 67.058,19.184
VCC_3V3_PULLUP: R52.2 SIWU.1 WR.1 | length 5.5
  Bottom Layer w0.18: WR.1@10.729,45.751 10.755,45.725 SIWU.1@10.755,42.625 10.794,42.586 R52.2@13.08,42.586 R52.2@13.067,42.573
VCC_BUS: C26.2 J2.1 R19.2 R36.1 | length 36
  Top Layer w0.254: C26.2@10.736,8.081 C26.2@10.781,8.036
  Top Layer w0.4: J2.1@10.781,6.359 C26.2@10.781,8.036
  Top Layer w0.6: v1@23.086,15.691 R19.2@23.086,16.877 R36.1@28.319,16.877
  Top Layer w0.8: v1(9.485,8.081) C26.2@10.736,8.081
  Bottom Layer w0.6: v1(9.485,8.081) 9.485,5.888 11.446,3.927 20.079,3.927 23.09,6.938 v1(23.09,15.691)
VCC_PWR: P1.1 R32.1 R33.1 R34.1 R35.2 | length 91.9
  Top Layer w0.6: 74.098,87.916 R32.1@74.893,87.916
  Top Layer w0.635: 4.787,89.07 R35.2@5.769,89.07
  Top Layer w1.37: 4.787,89.07 4.787,84.92 R34.1@5.92,83.787 ; 4.836,89.277 P1.1@7.646,92.087 9.076,92.087 13.147,96.158 70.574,96.158 74.123,92.572 74.098,87.916 74.068,82.228 74.365,81.928
VCC_USB: J1.1 R48.1 | length 5.5
  Top Layer w0.6: R48.1@62.753,8.787 R48.1@62.826,8.776 ; R48.1@62.828,8.787 65.585,8.787 J1.1@67.496,6.875
VDD_10: C47.1 C48.1 C56.1 C57.1 C58.1 C62.1 C69.1 C71.1 L3.1 TP5.1 U8.3 U8.30 U8.33 U8.39 U8.48 | length 45.4
  Top Layer w0.18: U8.3@12.015,28.911 U8.3@12.413,28.911 13.04,28.911 13.408,28.543 13.408,27.614 13.637,27.385 14.727,27.385 15.941,26.171 17.011,26.171 17.392,25.79 18.176,25.79 18.176,22.684 17.614,22.684 17.192,22.262 17.192,21.74 U8.30@17.188,21.736 ; 18.198,25.79 18.348,25.94 19.034,25.94 ; v1@18.212,22.684 18.394,22.502 18.394,21.742 U8.33@18.388,21.736 ; v1(18.727,25.61) 18.727,25.633 19.034,25.94 ; U8.39@21.163,22.511 20.708,22.511 20.448,22.77 20.448,24.303 20.097,24.654 20.097,25.94 ; v1@22.302,26.183 22.23,26.111 U8.48@21.163,26.111 20.268,26.111 20.097,25.94 ; 19.034,25.94 20.097,25.94
  Top Layer w0.254: U8.39@21.163,22.511 22.486,22.511 v1(22.578,22.419) ; v1@22.626,22.464 23.461,22.464 25.872,20.053 28.041,20.053 TP5.1@28.184,19.91
  Bottom Layer w0.18: C56.1@19.25,25.63 C56.1@19.275,25.605
  Bottom Layer w0.254: v1@18.212,22.684 18.22,22.691 18.22,23.487 C69.1@18.227,23.494 ; v1@22.524,22.398 22.524,21.786 C71.1@22.592,21.718
  Bottom Layer w0.3: L3.1@12.789,32.467 12.789,32.442 13.941,31.29 13.941,29.436 13.408,28.903 v1@13.408,27.853 ; v1@13.406,27.718 C47.1@14.176,27.718 ; C47.1@14.163,27.811 C48.1@15.237,27.811 ; C69.1@18.19,23.448 C62.1@18.19,24.448 ; C62.1@18.267,24.541 C58.1@18.267,25.564 ; v1(18.727,25.61) 18.741,25.596 19.286,25.596 C56.1@19.3,25.583 ; C56.1@19.28,25.46 20.342,25.46 20.342,25.49 20.418,25.566 21.035,26.183 v1@22.302,26.183
  other v1: 18.199,22.754 22.263,26.222 13.494,27.758
WR_N: RN5.5 U8.11 | length 10.8
  Top Layer w0.18: RN5.5@10.122,34.529 10.122,29.495 9.751,29.124 9.751,27.103 11.143,25.711 U8.11@12.413,25.711
WR_N_2: pad.2@10.09,37.067 RN5.12 WR.2 | length 18.1
  Top Layer w0.18: WR.2@8.189,45.751 8.119,45.751 6.584,44.216 4.916,44.216 4.063,43.363 4.063,38.962 4.397,38.628 9.832,38.628 10.09,38.37 pad.2@10.09,37.067 10.09,36.061 RN5.12@10.122,36.029
pads on no net: J1.MH1 J1.MH2 J2.4 RN1.4 RN1.13 RN2.3 RN2.5 RN2.12 RN2.14 U4.2 U5.35 U5.36 U5.50 U5.51 U5.58 U5.77 U5.109 U5.133 U6.2 U6.19 U6.22 U6.26 U6.27 U6.28 U6.29 U6.30 U6.32 U6.33 U6.34 U6.36 U6.46 U6.48 U6.52 U6.53 U6.54 U6.55 U6.57 U6.58 U6.59 U6.60 U7.7 U8.19 U10.1 U10.20

## Polygon pours and split planes (outlines as drawn)
GND on Top Layer "Top Layer-GND 1" (solid, remove dead copper, pour order 32): 17.305,60.313 16.317,59.325 16.317,51.73 17.274,50.773 21.322,50.773 24.639,54.09 24.639,59.513 23.839,60.313
GND on Top Layer "Top Layer-GND 2" (solid, remove dead copper, pour order 36): 7.989,97.058 2.843,91.912 2.843,65.283 3.747,64.379 16.632,64.379 22.058,69.805 22.058,89.245 24.657,91.844 66.704,91.844 68.851,89.697 68.851,73.76 70.773,71.838 81.622,71.838 82.866,73.082 82.866,97.27
GND on Top Layer "Top Layer-GND 3" (solid, remove dead copper, pour order 37): 53.453,52.541 52.275,52.245 52.137,52.107 52.137,51.714 52.97,50.3 64.335,50.3 65.003,50.968 65.003,56.428 64.001,57.43 58.73,57.43
LCD_VDD_2V5 on Top Layer "2V5" (solid, remove dead copper, pour order 34): 16.834,79.103 13.226,75.495 7.144,75.495 5.906,74.257 5.906,69.664 10.415,65.155 12.304,65.155 12.744,65.595 12.723,65.616 12.723,70.42 13.373,71.07 13.394,71.049 14.569,71.049 18.89,66.728 22.036,69.874 22.036,86.364 20.997,87.403 18.253,87.403 16.905,86.055
GND on Top Layer "Top Layer-GND 1" (solid, remove dead copper, pour order 38): 75.074,50.33 74.146,49.402 74.146,44.056 75.119,43.083 79.616,43.083 80.64,44.107 80.64,49.53 79.84,50.33
GND on Top Layer "Top Layer-GND" (solid, remove dead copper, pour order 4): 5.574,20.584 5.574,15.231 7.841,12.964 11.67,12.964 12.559,13.853 12.559,18.727 14.21,20.378 14.21,22.289 13.989,22.511 13.54,22.511 13.563,22.489 13.423,22.349 13.363,22.349 13.363,21.065 13.263,20.965 5.955,20.965
GND on Top Layer "Top Layer-GND 4" (solid, remove dead copper, pour order 16): 61.202,18.831 61.202,11.71 62.381,10.531 65.001,10.531 66.124,11.656 66.124,19.299 65.737,19.56 65.237,19.56 62.006,19.56
LCD_VDD_2V5 on Bottom Layer "Bottom Layer-LCD_VDD_2V5" (solid, remove dead copper, pour order 39): 16.811,79.074 13.203,75.466 7.121,75.466 5.883,74.228 5.883,69.635 10.392,65.126 12.281,65.126 12.721,65.566 12.7,65.587 12.7,70.391 13.35,71.041 13.371,71.02 14.546,71.02 18.867,66.699 22.013,69.845 22.013,86.335 20.974,87.374 18.23,87.374 16.882,86.026
GND on GND (split plane): 83.102,97.434 83.102,2.327 2.504,2.327 2.504,97.434
VCC_3V3 on PWR (split plane): 69.126,89.7 69.126,80.573 69.134,80.508 69.16,80.447 69.2,80.395 71.035,78.56 71.087,78.52 71.148,78.494 71.213,78.486 83.102,78.486 83.102,2.327 2.504,2.327 2.504,74.035 12.186,74.035 12.251,74.043 12.312,74.069 12.364,74.109 17.634,79.379 17.674,79.431 17.7,79.492 17.708,79.557 17.708,89.606 19.748,91.646 67.18,91.646
GND on PWR (split plane): 83.102,97.434 83.102,78.99 71.317,78.99 69.63,80.677 69.63,89.804 69.622,89.869 69.596,89.93 69.574,89.96 69.556,89.982 67.462,92.076 67.41,92.116 67.349,92.142 67.284,92.15 19.644,92.15 19.579,92.142 19.518,92.116 19.466,92.076 17.278,89.888 17.238,89.836 17.212,89.775 17.204,89.71 17.204,79.661 12.082,74.539 2.504,74.539 2.504,97.434

## Other copper
PWR (plane layer: these items are gaps in the copper):
  lines w0.5: 2.002,74.287 12.186,74.287 17.456,79.557 17.456,89.71 19.644,91.898 67.284,91.898 69.378,89.804 69.378,80.573 71.213,78.738 83.442,78.738

## Silkscreen, mask and mechanical layers (free items; w line width, h text height)
Top Overlay:
  lines w0.254: 12.866,10.671 15.132,10.671 15.678,10.125 ; 21.476,94.67 24.78,94.67 ; 21.526,92.476 25.293,92.476 ; 25.789,94.67 28.402,94.67 ; 26.504,92.476 28.426,92.476
  text "2" at 25.003,94.259 h1.5
  text "CMMPE DD511 YW479 ACK49 PJC209" at 30.79,92.702 h1.2
  text "cm pe" at 21.417,92.352 h3
  text "-" at 79.256,59.786 h0.8 r90
  text "+" at 76.747,59.706 h0.8 r90
  text "-" at 79.281,57.575 h0.8 r90
  text "+" at 76.772,57.495 h0.8 r90
  text "GND" at 81.616,45.827 h1.2 r90
  text "+" at 47.571,37.08 h0.8
  text "GND" at 59.126,36.435 h1.2
  text "-" at 47.638,34.404 h0.8
  text "1->2" at 39.049,27.06 h1.2
  text "Fast" at 38.905,24.86 h1.2
  text "1" at 11.337,15.546 h1.2 r90
  text "+" at 27.162,13.491 h0.8
  text "-" at 27.242,10.982 h0.8
  text "1" at 12.391,8.505 h0.8
  text "2" at 15.036,8.505 h0.8
  text "1" at 16.691,8.492 h0.8
  text "PWR_ON" at 44.579,8.224 h1.2
  text "-" at 42.499,7.902 h0.8 r180
  text "-" at 56.916,7.902 h0.8 r180
  text "+" at 40.066,7.577 h0.8 r90
  text "+" at 59.586,7.577 h0.8 r90
  text "Rev 1.1" at 53.357,5.565 h1
  text "Designed by CMMPE in Cambridge" at 30.671,3.369 h1
Bottom Overlay:
  lines w0.254: 6.852,27.236 6.327,26.711 6.327,24.705 6.327,24.565 7.039,23.853 ; 19.374,25.567 24.369,25.567
  text "-" at 53.57,59.993 h0.8 r180
  text "+" at 53.778,57.062 h0.8 r90

## Text inside footprints (layer, text, board x,y; h text height)
J1: Top Assembly "PCB Edge" at 67.688,1.582 h1.2
J2: Top Assembly "PCB Edge" at 13.051,1.329 h1.2
P2: Top Overlay "1" at 44.318,27.307 h1; Top Overlay "2" at 51.307,27.326 h1; Top Overlay "3" at 44.022,24.383 h1
P6-GND: Top Overlay "6" at 21.355,51.437 h1.27 r270; Top Overlay "5" at 18.815,51.437 h1.27 r270; Top Overlay "2" at 21.355,60.581 h1.27 r270; Top Overlay "1" at 18.815,60.073 h1.27 r270